# EAGLE board ArduinoShield2Basic (EAGLE 7.7.0)
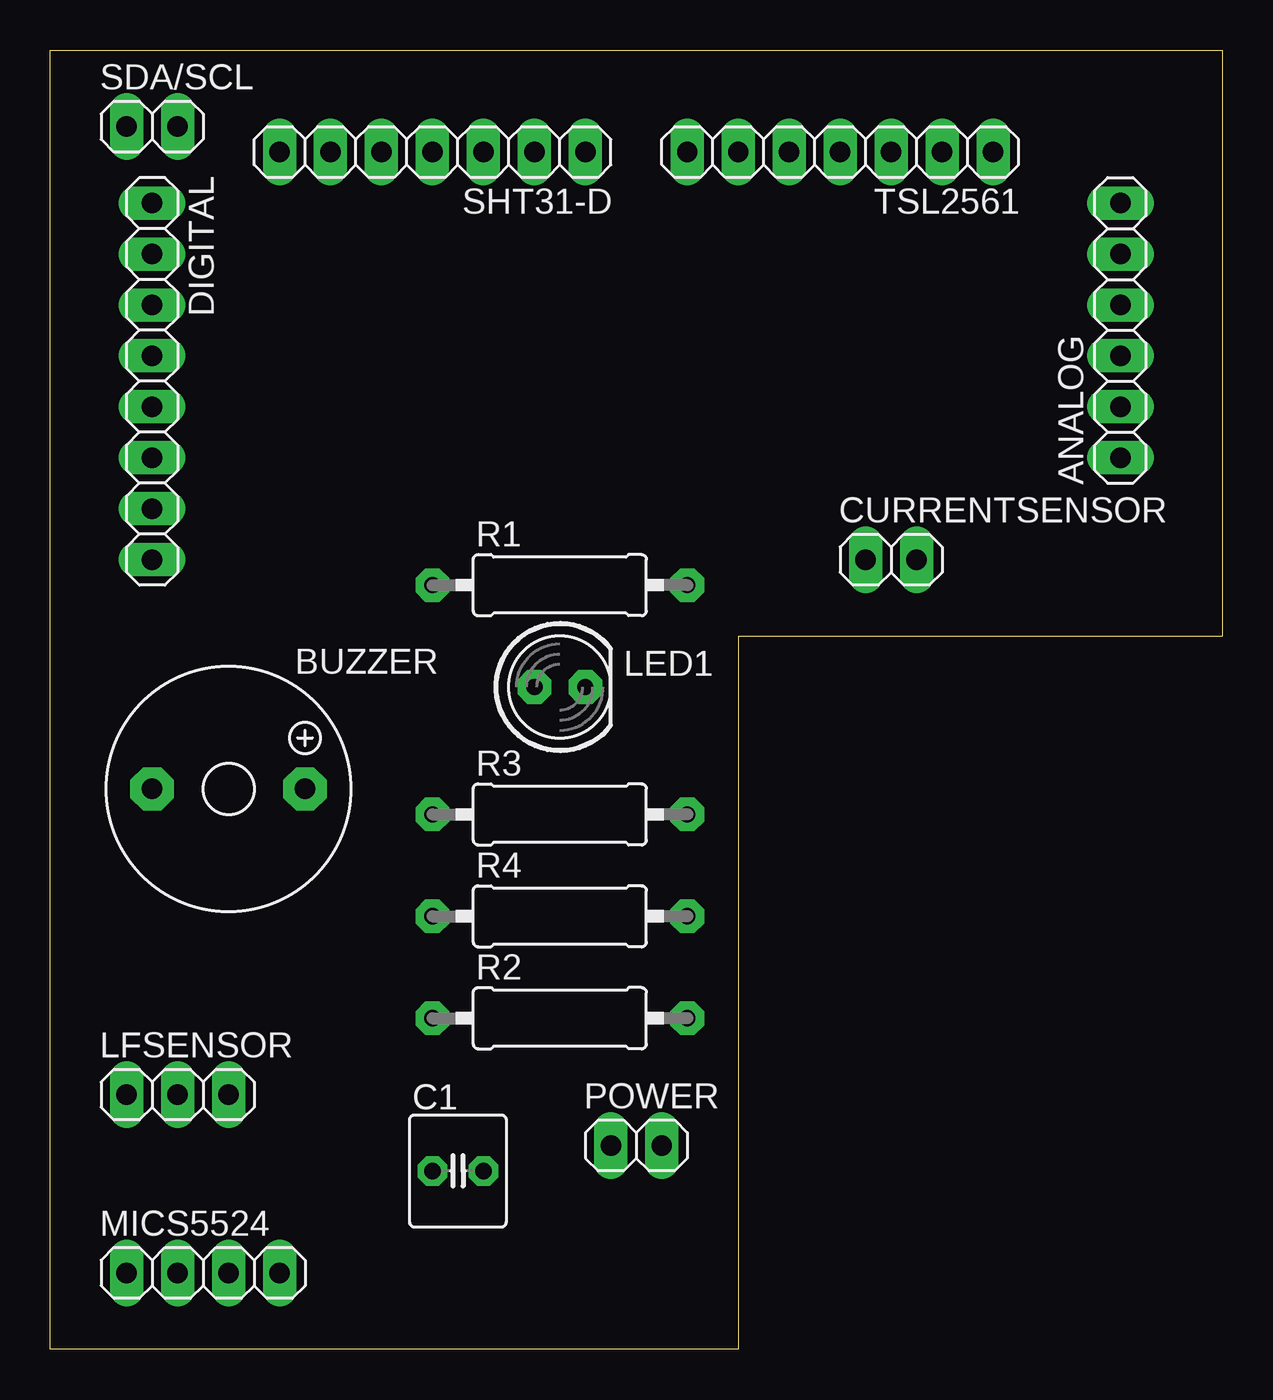
[diagram p0: board, top side]
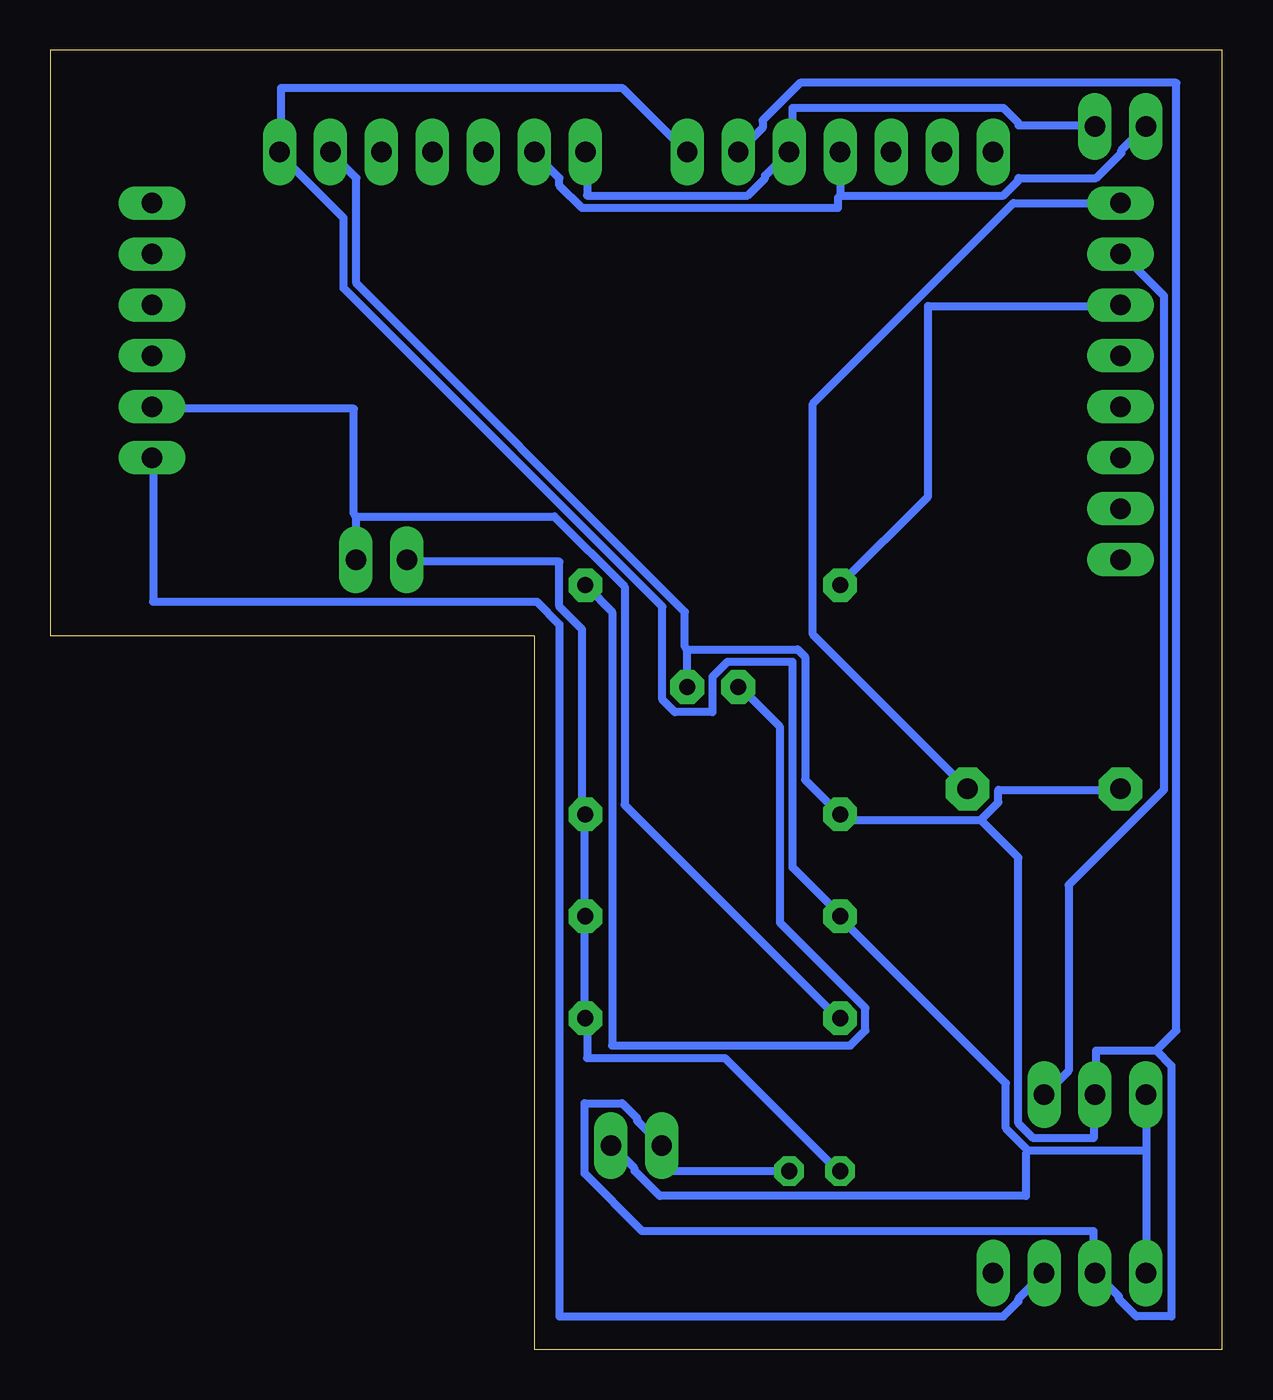
[diagram p1: board, bottom side, seen from below]

Size 58.42 x 64.77 mm. Coordinates in mm from the lower left corner, seen from the top.
Outline: 0,0 0,64.77 58.42,64.77 58.42,35.56 34.29,35.56 34.29,0 0,0
Copper layers (1*16): Top 0.035mm / dielectric 1.5mm / Bottom 0.035mm
Design rules "default *": minimum track width 16mil, minimum drill 24mil, track to track 8mil, track to pad 8mil, pad to pad 8mil, via to via 8mil, smd to smd 8mil, copper to edge 40mil, drill to drill 8mil, minimum pad ring 13mil, minimum via ring 8mil, stop-mask expansion 4mil, vias tented up to drill 0mil, thermal gap 10mil

## Footprints (pad centres in the part's own frame; a part is rotated, then mirrored left to right if it is on the bottom)
1X06 = drill 1.016 long: 1 -6.35,0; 2 -3.81,0; 3 -1.27,0; 4 1.27,0; 5 3.81,0; 6 6.35,0
F/TMB = drill 1.016 pad 2.159 octagon: + 3.81,0; - -3.81,0
C025-060X050 = drill 0.813 octagon: 1 -1.27,0; 2 1.27,0
1X02 = drill 1.016 long: 1 -1.27,0; 2 1.27,0
1X08 = drill 1.016 long: 1 -8.89,0; 2 -6.35,0; 3 -3.81,0; 4 -1.27,0; 5 1.27,0; 6 3.81,0; 7 6.35,0; 8 8.89,0
LED5MM = drill 0.813 pad 1.676 octagon: A -1.27,0; K 1.27,0
1X03 = drill 1.016 long: 1 -2.54,0; 2 0,0; 3 2.54,0
1X04 = drill 1.016 long: 1 -3.81,0; 2 -1.27,0; 3 1.27,0; 4 3.81,0
0309/12 = drill 0.813 pad 1.676 octagon: 1 -6.35,0; 2 6.35,0
1X07 = drill 1.016 long: 1 -7.62,0; 2 -5.08,0; 3 -2.54,0; 4 0,0; 5 2.54,0; 6 5.08,0; 7 7.62,0

## Placement (x,y rotation side)
ANALOG  [1X06]  53.34,50.8 90 top
BUZZER  F/TMB  [F/TMB]  8.89,27.94 0 top
C1  10uF  [C025-060X050]  20.32,8.89 0 top
CURRENTSENSOR  [1X02]  41.91,39.37 0 top
DIGITAL  [1X08]  5.08,48.26 270 top
LED1  [LED5MM]  25.4,33.02 0 top
LFSENSOR  [1X03]  6.35,12.7 0 top
MICS5524  [1X04]  7.62,3.81 0 top
POWER  [1X02]  29.21,10.16 0 top
R1  220Ω  [0309/12]  25.4,38.1 0 top
R2  33Ω  [0309/12]  25.4,16.51 0 top
R3  10kΩ  [0309/12]  25.4,26.67 0 top
R4  10kΩ  [0309/12]  25.4,21.59 0 top
SDA/SCL  [1X02]  5.08,60.96 0 top
SHT31-D  [1X07]  19.05,59.69 180 top
TSL2561  [1X07]  39.37,59.69 180 top

## Library data of the parts
ANALOG CURRENTSENSOR DIGITAL LFSENSOR MICS5524 POWER SDA/SCL SHT31-D TSL2561 = pinhead
BUZZER = buzzer; OC_FARNELL: unknown; OC_NEWARK: unknown
C1 LED1 R1-R4 = adafruit

## Nets
+5V: LFSENSOR.1 MICS5524.1 POWER.2 R4.1 SHT31-D.1 TSL2561.1
GND: BUZZER.- C1.2 LED1.K LFSENSOR.2 MICS5524.2 POWER.1 R3.1 SHT31-D.2 TSL2561.2
N$3: ANALOG.1 MICS5524.3
N$5: LED1.A R1.2
N$6: BUZZER.+ DIGITAL.1
N$8: DIGITAL.2 LFSENSOR.3
N$9: DIGITAL.3 R1.1
SCL: SDA/SCL.2 SHT31-D.3 TSL2561.7
SDA: SDA/SCL.1 SHT31-D.4 TSL2561.6
SLEEVE: ANALOG.2 CURRENTSENSOR.2 R2.1
TIP: C1.1 CURRENTSENSOR.1 R2.2 R3.2 R4.2

## Tracks (layer width: path | path; a pad name or v marks a point on that pad's centre or on a via)
+5V
  Bottom 0.406: SHT31-D.1 26.79,59.77 29.91,62.9 46.91,62.9 46.91,59.77 TSL2561.1 46.91,59.52 43.79,56.4 43.79,52.9 27.91,37.02 27.91,32.4 27.29,31.77 25.41,31.77 25.41,33.52 24.66,34.27 21.41,34.27 21.41,24.02 19.16,21.77 R4.1 19.04,21.52 10.79,13.27 10.79,11.02 9.66,9.89 | 3.79,9.89 3.79,12.64 LFSENSOR.1 | 3.79,9.89 3.79,3.9 MICS5524.1 | 3.79,9.89 9.66,9.89 | POWER.2 30.41,10.14 29.29,9.02 29.29,8.89 28.04,7.64 9.79,7.64 9.79,9.77 9.66,9.89
GND
  Bottom 0.406: 26.66,34.9 21.16,34.9 20.79,34.52 20.79,28.39 19.16,26.77 R3.1 18.91,26.52 18.91,26.39 12.04,26.39 | 26.66,34.9 LED1.K | TSL2561.2 44.41,59.65 43.16,58.4 43.16,53.15 26.79,36.77 26.79,35.02 26.66,34.9 | 12.04,26.39 11.16,27.27 11.16,27.89 5.17,27.89 BUZZER.- | C1.2 21.66,8.89 27.91,8.89 27.91,10.14 POWER.1 28.04,10.27 29.16,11.39 29.16,11.52 29.91,12.27 31.79,12.27 31.79,8.77 28.91,5.89 6.42,5.89 6.42,3.9 MICS5524.2 6.29,3.77 5.17,2.65 5.17,2.52 4.29,1.65 2.54,1.65 2.54,14.14 3.29,14.89 | 3.29,14.89 6.29,14.89 6.29,12.77 LFSENSOR.2 6.42,12.52 6.42,10.52 9.41,10.52 10.16,11.27 10.16,24.52 12.04,26.39 | 3.29,14.89 2.29,15.89 2.29,63.15 21.04,63.15 22.91,61.27 22.91,60.9 24.04,59.77 SHT31-D.2
N$3
  Bottom 0.406: MICS5524.3 8.91,3.77 10.16,2.52 10.16,2.4 10.91,1.65 33.04,1.65 33.04,36.15 34.16,37.27 53.29,37.27 53.29,44.4 ANALOG.1
N$5
  Bottom 0.406: LED1.A 24.04,33.02 22.04,31.02 22.04,21.27 17.79,17.02 17.79,15.89 18.54,15.14 30.41,15.14 30.41,36.77 31.66,38.02 R1.2
N$6
  Bottom 0.406: DIGITAL.1 5.17,57.15 10.41,57.15 20.41,47.15 20.41,35.65 12.79,28.02 BUZZER.+
N$8
  Bottom 0.406: LFSENSOR.3 8.79,12.77 7.67,13.89 7.67,23.14 2.92,27.89 2.92,52.52 5.04,54.65 DIGITAL.2
N$9
  Bottom 0.406: DIGITAL.3 5.17,52.02 14.66,52.02 14.66,42.52 19.04,38.15 R1.1
SCL
  Bottom 0.406: TSL2561.7 31.66,59.65 31.66,57.52 23.66,57.52 22.79,58.4 22.79,58.52 21.66,59.65 SHT31-D.3 21.41,59.77 21.41,61.9 10.91,61.9 10.16,61.15 10.16,61.02 6.42,61.02 SDA/SCL.2
SDA
  Bottom 0.406: 19.04,57.52 10.91,57.52 10.16,58.27 10.16,58.4 6.29,58.4 5.04,59.65 5.04,59.77 3.92,60.9 SDA/SCL.1 | 19.04,57.52 19.04,59.65 SHT31-D.4 | TSL2561.6 34.29,59.65 33.04,58.4 33.04,58.02 31.91,56.9 19.16,56.9 19.16,57.4 19.04,57.52
SLEEVE
  Bottom 0.406: 43.16,41.52 33.29,41.52 29.79,38.02 29.79,27.14 19.16,16.52 R2.1 | 43.16,41.52 43.16,39.4 CURRENTSENSOR.2 | ANALOG.2 53.29,46.9 43.29,46.9 43.29,41.65 43.16,41.52
TIP
  Bottom 0.406: C1.1 19.16,8.89 24.79,14.52 31.66,14.52 31.66,16.39 R2.2 31.79,16.64 31.79,21.52 R4.2 31.79,21.77 31.79,26.64 R3.2 31.91,26.77 31.91,35.9 33.04,37.02 33.04,39.27 40.54,39.27 CURRENTSENSOR.1